# EAGLE board CT_schematic (EAGLE 7.6.0)

Size 100 x 80 mm. Coordinates in mm from the lower left corner, seen from the top.
Outline: 0,0 100,0 100,80 0,80 0,0
Copper layers (1*16): Top 0.035mm / dielectric 1.5mm / Bottom 0.035mm
Design rules "default": minimum track width 10mil, minimum drill 24mil, track to track 8mil, track to pad 8mil, pad to pad 8mil, via to via 8mil, smd to smd 8mil, copper to edge 40mil, drill to drill 8mil, minimum pad ring 10mil, minimum via ring 8mil, stop-mask expansion 4mil, vias tented up to drill 0mil, thermal gap 10mil

## Footprints (pad centres in the part's own frame; a part is rotated, then mirrored left to right if it is on the bottom)
C0603 = smd 0.8 x 0.8: 1 -0.762,0; 2 0.762,0
C0402 = smd 0.5 x 0.5: 1 -0.508,0; 2 0.508,0
R0603 = smd 0.8 x 0.8: 1 -0.762,0; 2 0.762,0
C1210 = smd 1.2 x 2.5: 1 -1.524,0; 2 1.524,0
EXV-9H = smd 3.505 x 1.676: 1 -2.857,0; 2 2.857,0
L0603 = smd 0.8 x 0.8: 1 -0.762,0; 2 0.762,0
PJ-037B_PACKAGE = drill 3.7 square: 1 12,0 | drill 3.2 square: 2 6,0
EWLCSP49 = smd 0.28 x 0.28: A1 0,0; A2 0.4,0; A3 0.8,0; A4 1.2,0; A5 1.6,0; A6 2,0; A7 2.4,0; B1 0,-0.4; B2 0.4,-0.4; B3 0.8,-0.4; B4 1.2,-0.4; B5 1.6,-0.4; B6 2,-0.4; B7 2.4,-0.4; C1 0,-0.8; C2 0.4,-0.8; C3 0.8,-0.8; C4 1.2,-0.8; C5 1.6,-0.8; C6 2,-0.8; C7 2.4,-0.8; D1 0,-1.2; D2 0.4,-1.2; D3 0.8,-1.2; D4 1.2,-1.2; D5 1.6,-1.2; D6 2,-1.2; D7 2.4,-1.2; E1 0,-1.6; E2 0.4,-1.6; E3 0.8,-1.6; E4 1.2,-1.6; E5 1.6,-1.6; E6 2,-1.6; E7 2.4,-1.6; F1 0,-2; F2 0.4,-2; F3 0.8,-2; F4 1.2,-2; F5 1.6,-2; F6 2,-2; F7 2.4,-2; G1 0,-2.4; G2 0.4,-2.4; G3 0.8,-2.4; G4 1.2,-2.4; G5 1.6,-2.4; G6 2,-2.4; G7 2.4,-2.4
ABLS-25.000MHZ-B2F-T = smd 5.6 x 2.8: 1 -3.81,0; 2 5.69,0
ASEK = smd 1.4 x 1: 1 -1.1,-0.8; 2 1.1,-0.8; 3 1.1,0.8; 4 -1.1,0.8
WSON-8 = smd 0.3 x 0.6: 1 -0.75,0; 2 0.05,0; 3 0.85,0; 4 1.65,0; 5 1.65,3.8; 6 0.85,3.8; 7 0.05,3.8; 8 -0.75,3.8 | smd 3 x 2.6: PAD 0.45,1.9
SON-6 = smd 0.55 x 0.3: 1 -0.355,0.5 | smd 0.52 x 0.3: 2 -0.37,0; 3 -0.37,-0.5; 4 0.37,-0.5; 5 0.37,0; 6 0.37,0.5
SW_4-1437565-2 = smd 1.4 x 2.1: 1 -2.23,4.55; 2 -2.23,-4.55; 3 2.23,4.55; 4 2.23,-4.55
LGM67K-G1J2-24-Z = smd 0.8 x 1.4: A -2,0; C 0,0
NC7SZ125M5X = smd 1.3 x 0.7: 1 -1.3,0.95; 2 -1.3,0; 3 -1.3,-0.95; 4 1.3,-0.95; 5 1.3,0.95
DUMMY_PACKAGE_81 = drill 0.3: 1 0,-1; 2 1.5,-1; 3 3,-1

## Placement (x,y rotation side)
C1  1e-07  [C0603]  -22.86,46.99 0 top  (outside the outline)
C2  1e-07  [C0603]  -26.67,46.99 0 top  (outside the outline)
C3  1e-07  [C0603]  -30.48,46.99 0 top  (outside the outline)
C4  1e-07  [C0603]  -34.29,46.99 0 top  (outside the outline)
C5  4.7e-06  [C0603]  -19.05,46.99 0 top  (outside the outline)
C6  1e-08  [C0603]  -38.1,46.99 0 top  (outside the outline)
C7  1e-06  [C0603]  -41.91,46.99 0 top  (outside the outline)
C8  1e-07  [C0603]  -45.72,46.99 0 top  (outside the outline)
C9  1e-11  [C0402]  -30.48,52.07 0 top  (outside the outline)
C10  1e-11  [C0402]  -34.29,52.07 0 top  (outside the outline)
C11  1e-08  [C0402]  -38.1,52.07 0 top  (outside the outline)
C12  8e-07  [R0603]  -49.53,46.99 0 top  (outside the outline)
C13  1e-05  [C1210]  -45.72,35.56 0 top  (outside the outline)
C14  1e-07  [C0402]  -41.91,52.07 0 top  (outside the outline)
C15  0.0001  [EXV-9H]  -17.78,27.94 0 top  (outside the outline)
C16  0.0001  [EXV-9H]  -29.21,27.94 0 top  (outside the outline)
C17  1e-08  [C0402]  -45.72,52.07 0 top  (outside the outline)
F1  240.0  [L0603]  -53.34,46.99 0 top  (outside the outline)
J1  PJ-037B  [PJ-037B_PACKAGE]  -27.94,7.62 0 top  (outside the outline)
R1  10000.0  [R0603]  -41.91,41.91 0 top  (outside the outline)
R2  1000.0  [R0603]  -15.24,52.07 0 top  (outside the outline)
R3  1600.5  [R0603]  -19.05,52.07 0 top  (outside the outline)
R4  4700.0  [R0603]  -22.86,52.07 0 top  (outside the outline)
R5  10000.0  [R0603]  -46.99,41.91 0 top  (outside the outline)
R6  100000.0  [R0603]  -21.59,41.91 0 top  (outside the outline)
R7  153694.38  [R0603]  -16.51,41.91 0 top  (outside the outline)
R8  100000.0  [R0603]  -26.67,41.91 0 top  (outside the outline)
R9  10000.0  [R0603]  -52.07,41.91 0 top  (outside the outline)
R10  10000.0  [R0603]  -15.24,46.99 0 top  (outside the outline)
R11  9100.0  [R0603]  -26.67,52.07 0 top  (outside the outline)
R12  680000.0  [R0603]  -31.75,41.91 0 top  (outside the outline)
R13  120000.0  [R0603]  -36.83,41.91 0 top  (outside the outline)
U1  STM32L072CZE6TR  [EWLCSP49]  -27.94,36.83 0 top  (outside the outline)
U2  ABLS-25.000MHZ-B2F-T  [ABLS-25.000MHZ-B2F-T]  -48.26,27.94 0 top  (outside the outline)
U3  ASEK-32.768KHz-ECST  [ASEK]  -48.26,19.05 0 top  (outside the outline)
U4  LP2951ACSDX/NOPB  [WSON-8]  -29.21,17.78 0 top  (outside the outline)
U5  TPS3895ADRYR  [SON-6]  -13.97,55.88 0 top  (outside the outline)
U6  4-1437565-2  [SW_4-1437565-2]  -44.45,6.35 0 top  (outside the outline)
U7  Q65110A2395  [LGM67K-G1J2-24-Z]  -34.29,35.56 0 top  (outside the outline)
U8  nc7sz125m5x  [NC7SZ125M5X]  -50.8,34.29 0 top  (outside the outline)
U9  Dummy  [DUMMY_PACKAGE_81]  -52.07,52.07 0 top  (outside the outline)

## Library data of the parts
C1-C17 F1 J1 R1-R13 U1-U9 = circuit_tree

## Nets
CLK_CRYSTAL_U1_D6: C9.1 U1.D6 U2.1
CLK_CRYSTAL_U1_D7: C10.1 U1.D7 U2.2
CLK_U1_C6: U1.C6 U3.3
GND: C1.2 C2.2 C3.2 C4.2 C5.2 C6.2 C7.2 C8.2 C9.2 C10.2 C11.2 C12.2 C13.2 C14.2 C15.2 C16.2 C17.2 J1.2 R2.2 R5.2 R8.2 R11.2 R13.2 U1.D4 U3.2 U4.3 U4.4 U4.PAD U5.2 U7.C U8.1 U8.3 U9.1
NET_U1_A5: R5.1 U1.A5
NET_U1_D5: R4.1 U1.D5 U8.4
NET_U1_F7: C6.1 C7.1 F1.1 U1.E6 U1.F7
NET_U1_G6: R3.1 U1.G6 U7.A
NET_U1_G7: R1.1 U1.G7 U6.3 U6.4
NET_U4_5: R6.1 U4.5
NET_U4_7: R7.2 R8.1 U4.7
NET_U5_1: R10.1 R11.1 U5.1
NET_U5_3: R12.2 R13.1 U5.3
NET_U5_4: R9.1 U5.4 U8.2
NET_U6_1: R2.1 U6.1 U6.2
PROC_PA15: U1.A2 U9.2
PROC_PB3: U1.A3 U9.3
VCC_S1_15V7: C12.1 C15.1 C16.1 J1.1 U4.8
VCC_TIER1_3V3: C1.1 C2.1 C3.1 C4.1 C5.1 C8.1 C11.1 C13.1 C14.1 C17.1 F1.2 R1.2 R3.2 R4.2 R6.2 R7.1 R9.2 R10.2 R12.1 U1.A1 U1.A7 U1.B6 U1.G2 U3.4 U4.1 U5.6 U8.5

## Tracks (layer width: path | path; a pad name or v marks a point on that pad's centre or on a via)
CLK_CRYSTAL_U1_D6  (2 unrouted)
CLK_CRYSTAL_U1_D7  (2 unrouted)
CLK_U1_C6  (1 unrouted)
GND  (32 unrouted)
NET_U1_A5  (1 unrouted)
NET_U1_D5  (2 unrouted)
NET_U1_F7  (4 unrouted)
NET_U1_G6  (2 unrouted)
NET_U1_G7  (3 unrouted)
NET_U4_5  (1 unrouted)
NET_U4_7  (2 unrouted)
NET_U5_1  (2 unrouted)
NET_U5_3  (2 unrouted)
NET_U5_4  (2 unrouted)
NET_U6_1  (2 unrouted)
PROC_PA15  (1 unrouted)
PROC_PB3  (1 unrouted)
VCC_S1_15V7  (4 unrouted)
VCC_TIER1_3V3  (26 unrouted)